# Altium PCB Mach3.PcbDoc
Units mm, origin at the board's own origin, x right, y up, seen from the top; angles counter-clockwise.
Board outline 90 x 24.5 mm, 2 copper layers (Top Layer, Bottom Layer), stack 1.58 mm thick; 21 components, 15 nets, 119 pads, 11 vias.
Unrouted connection lines stored in the file: 1.
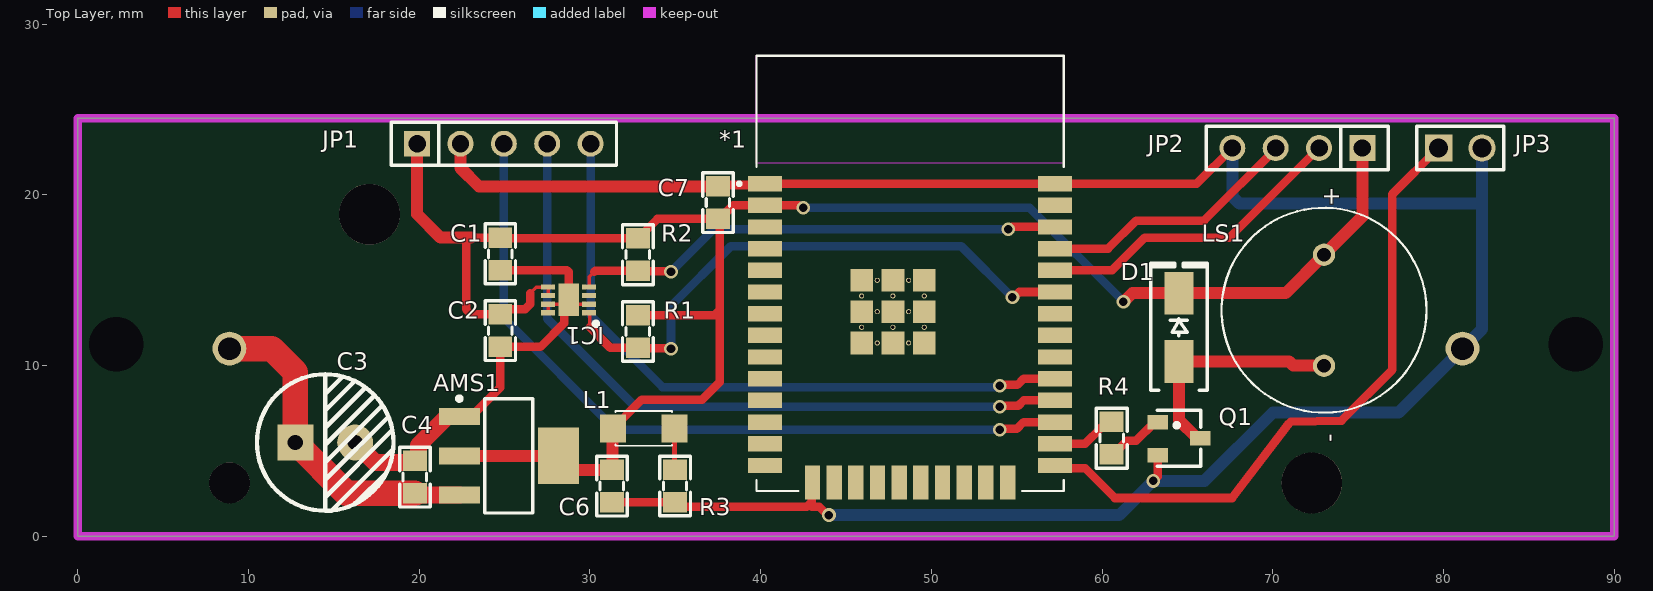
[diagram p0: Top Layer view]
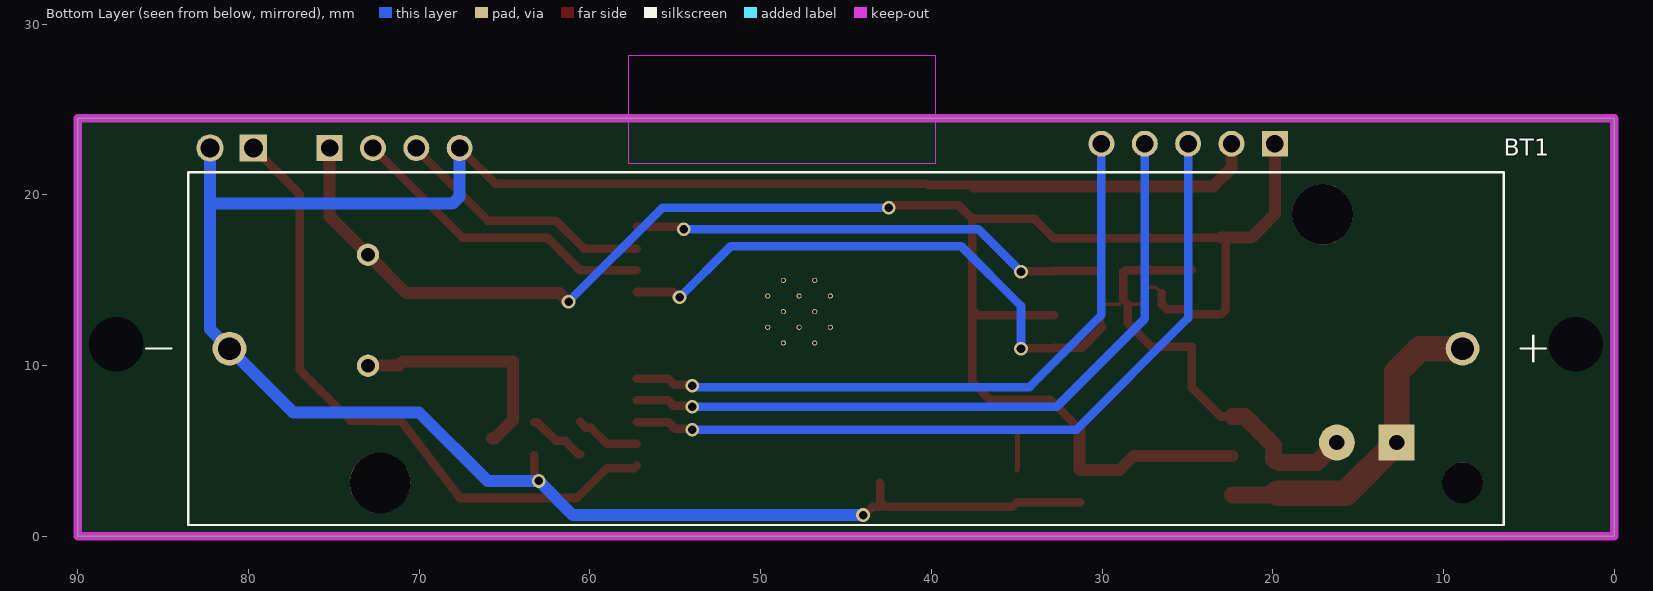
[diagram p1: Bottom Layer view, seen from below]
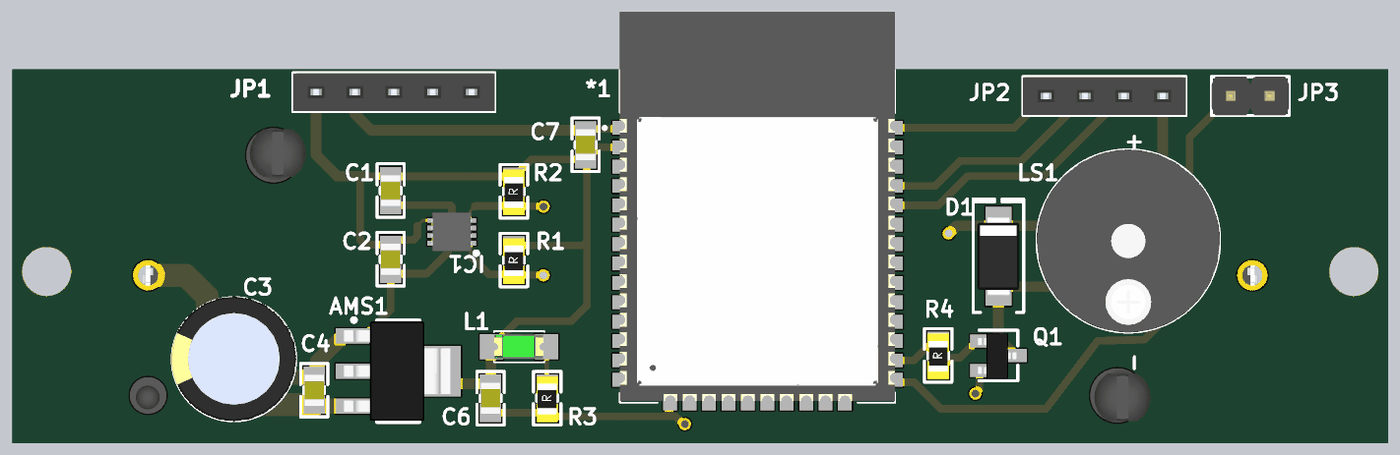
[diagram p2: 3D render of the assembled board from above, using the file's embedded part models]

## Layer stack, top to bottom
Top Solder: solder mask 0.01, Solder Resist, Dk 3.5
Top Layer: signal copper 0.035
Dielectric 1: dielectric 1.51, FR-4, Dk 4.8
Bottom Layer: signal copper 0.035
Bottom Solder: solder mask 0.01, Solder Resist, Dk 3.5

## Board outline
0.001,0 0.001,24.5 90,24.5 90,0

## Design rules (kind name [scope] priority, off if disabled: settings)
Clearance [All] p1: gap=0.3 ignorepadtopadclearanceinfootprint=FALSE
PolygonConnect [All] p1: connectstyle=Relief reliefconductorwidth=0.254 reliefentries=4 polygonreliefangle="90 Angle" airgapwidth=0.254
RoutingVias [All] p1: holewidth=0.5 width=0.8 viastyle="Through Hole" minholewidth=0.2 minwidth=0.45 maxholewidth=0.6 maxwidth=1
SolderMaskExpansion [All] p1: expansion=0.102 istentingtop=FALSE
Width [All] p1: maxlimit=1.5 minlimit=0.15 preferedwidth=0.3
30 further rules are at their usual default settings.

## Components (designator, comment, footprint, x,y, rotation, side; value= is the part's Value field where it differs from the comment)
*1 "ESP32 WROOM 32" ESP32-WROOM-32D 48.75,15.405 r0 top
AMS1 "AMS1117-3.3V" SOT223 25.25,4.721 r270 top value="AMS1117-3.3V SOT223"
BT1 "1043" BAT_1043 45,11 r180 bottom
C1 "4.7uF" "tu 0805" 24.753,16.554 r270 top
C2 "104" "tu 0805" 24.753,12.054 r270 top
C3 "10uF" "tu hoa 8mm" 14.5,5.5 r0 top
C4 "106 (10uF)" "tu 0805" 19.753,3.475 r270 top
C6 "22uF" "tu 0805" 31.291,2.95 r270 top
C7 "104" "tu 0805" 37.503,19.554 r270 top
D1 "M7" "DIODE SMA" 64.5,12.25 r90 top
IC1 "SHT30-DIS-B10KS_1" SON50P250X250X100-9N-D 28.75,13.85 r180 top
JP1 "JP 1x5 2.54" "JP 1x5 CT" 19.88,23 r0 top
JP2 "JP 1x4 2.54" "JP 1x4 CT" 75.25,22.75 r180 top
JP3 "JP 1x2 2.54" "JP 1x2 DT" 79.71,22.75 r0 top
L1 "LED 0805" LED-1206-Green 31.35,6.325 r0 top
LS1 "CCG-1206" CUI_CCG-1206 73,13.25 r270 top
Q1 "BC817" SOT-23 64.5,5.75 r270 top value=C9014
R1 "10k" "tro smd 0805" 32.75,12 r90 top
R2 "10k" "tro smd 0805" 32.75,16.5 r90 top
R3 "1k" "tro smd 0805" 34.925,2.953 r90 top
R4 "1k" "tro smd 0805" 60.5,5.75 r90 top

## Footprints (in the part's own frame and the unit in brackets; to place one, negate y for a bottom-side part, rotate by r counter-clockwise, add the part's x,y. Pads: shape width x height; smd on the part's side, far side on the other; paste and mask are expansions set on the pad)
BAT_1043 [mm]
  round 1.98 hole 1.32: N(-36.11,0) P(36.11,0)
  round 3.55 hole 3.55 unplated: ""(-27.29,-7.87) ""(27.91,7.87)
  round 2.39 hole 2.39 unplated: ""(36.11,-7.87)
  silkscreen extent -41,-10.33 41,10.33, body extent -38.53,-10.33 38.53,10.33, height 14.86
CUI_CCG-1206 [mm]
  round 1.308 hole 0.8: M(3.25,0) P(-3.25,0)
  silkscreen extent -6,-6 6,6, body extent -6,-6 6,6, height 10
"DIODE SMA" [mm] "SMA"
  rect 2.5x1.7 smd: 1(-2,0) 2(2,0)
  silkscreen extent -3.68,-1.65 3.75,1.65, body extent -2.6,-1.37 2.6,1.37, height 2.4
ESP32-WROOM-32D [mm]
  rect 2x0.9 smd: 1(-8.5,5.26) 2(-8.5,3.99) 3(-8.5,2.72) 4(-8.5,1.45) 5(-8.5,0.18) 6(-8.5,-1.09) 7(-8.5,-2.36) 8(-8.5,-3.63) 9(-8.5,-4.9) 10(-8.5,-6.17) 11(-8.5,-7.44) 12(-8.5,-8.71) 13(-8.5,-9.98) 14(-8.5,-11.25) 25(8.5,-11.25) 26(8.5,-9.98) 27(8.5,-8.71) 28(8.5,-7.44) 29(8.5,-6.17) 30(8.5,-4.9) 31(8.5,-3.63) 32(8.5,-2.36) 33(8.5,-1.09) 34(8.5,0.18) 35(8.5,1.45) 36(8.5,2.72) 37(8.5,3.99) 38(8.5,5.26)
  rect 0.9x2 smd: 15(-5.715,-12.25) 16(-4.445,-12.25) 17(-3.175,-12.25) 18(-1.905,-12.25) 19(-0.635,-12.25) 20(0.635,-12.25) 21(1.905,-12.25) 22(3.175,-12.25) 23(4.445,-12.25) 24(5.715,-12.25)
  rect 1.33x1.33 smd: 39(-2.835,-4.075) 39(-2.835,-2.24) 39(-2.835,-0.405) 39(-1,-4.075) 39(-1,-2.24) 39(-1,-0.405) 39(0.835,-4.075) 39(0.835,-2.24) 39(0.835,-0.405)
  round 0.3 hole 0.2: 39(-2.835,-3.157) 39(-2.835,-1.322) 39(-1.917,-4.075) 39(-1.917,-2.24) 39(-1.917,-0.405) 39(-1,-3.157) 39(-1,-1.322) 39(-0.082,-4.075) 39(-0.082,-2.24) 39(-0.082,-0.405) 39(0.835,-3.157) 39(0.835,-1.322)
  Keep-Out Layer region: 9,6.45 -9,6.45 -9,12.75 9,12.75
  Keep-Out Layer region: 9,6.45 -9,6.45 -9,12.75 9,12.75
  silkscreen extent -10.1,-12.75 9,12.75, body extent -9,-12.62 9,12.88, height 3.2
"JP 1x2 DT" [mm] "2 pins, 1 row, straight, gold plating"
  rect 1.6x1.6 hole 1.1: 1(0,0)
  round 1.6 hole 1.1: 2(2.54,0)
  silkscreen extent -1.27,-1.27 3.81,1.27, body extent -1.27,-1.27 3.81,1.27, height 8.54
"JP 1x4 CT" [mm]
  rect 1.52x1.52 hole 1.02: 1(0,0)
  round 1.52 hole 1.02: 2(2.54,0) 3(5.08,0) 4(7.62,0)
  silkscreen extent -1.52,-1.27 9.14,1.27, body extent -1.52,-1.25 9.14,1.25, height 8.51
"JP 1x5 CT" [mm]
  rect 1.52x1.52 hole 1.02: 1(0,0)
  round 1.52 hole 1.02: 2(2.54,0) 3(5.08,0) 4(7.62,0) 5(10.16,0)
  silkscreen extent -1.52,-1.27 11.68,1.27, body extent -1.52,-1.25 11.68,1.25, height 8.51
LED-1206-Green [mil]
  rect 60x65 smd: 1(0,0) 2(142,0)
  silkscreen extent 6,-40 136,40, body extent 7,-31 133,32, height 43
SON50P250X250X100-9N-D [mm]
  rect 0.8x0.3 smd: 1(-1.2,0.75) 2(-1.2,0.25) 3(-1.2,-0.25) 4(-1.2,-0.75) 5(1.2,-0.75) 6(1.2,-0.25) 7(1.2,0.25) 8(1.2,0.75)
  rect 1.2x1.9 smd: 9(0,0)
  silkscreen extent -1.73,1.28 -1.48,1.52, body extent -1.3,-1.25 1.3,1.25, height 1
SOT223 [mm]
  rect 1x2.4 smd: 1(-2.3,-2.9) 2(0,-2.9) 3(2.3,-2.9)
  rect 3.3x2.4 smd: 4(0,2.9)
  silkscreen extent -3.47,-3.02 3.35,1.4, body extent -3.25,-3.56 3.25,3.4, height 1.68
SOT-23 [mm] "SOT 23 _ 1-3-2"
  rect 0.85x1.2 smd: 1(-0.94,-1.245) 2(0.985,-1.25) 3(0.005,1.25)
  silkscreen extent -1.65,-1.27 1.65,1.27, body extent -1.47,-1.33 1.53,1.17, height 1.06
"tro smd 0805" [mm]
  rect 1.2x1.4 smd: 1(-0.946,-0.061) 2(0.954,-0.061)
  silkscreen extent -1.75,-0.97 1.75,0.84, body extent -1.56,-0.76 1.44,0.64, height 0.53
"tu 0805" [mm] "Compoment SMD 80x50mil"
  rect 1.2x1.4 smd: 1(-0.946,-0.003) 2(0.954,-0.003)
  silkscreen extent -1.75,-0.89 1.75,0.89, body extent -1.01,-0.64 1.01,0.63, height 0.61
"tu hoa 8mm" [mm]
  rect 2.1x2.1 hole 0.9: 1(-1.75,0)
  round 2.1 hole 0.9: 2(1.75,0)
  silkscreen extent -4,-4 4,4, body extent -4.1,-4.07 4.1,4.13, height 13.81

## Part data
AMS1: library part "AMS1117 SMD", "Dán", Chung_Loai=Dán, Don_Vi=Con, Ma_Hang=MH000596
BT1: "THM Holder for 18650 Battery", Package="NON STANDARD-5 Keystone", Check_prices=https://www.snapeda.com/parts/1043/Keystone/view-part/?ref=eda, MF="Keystone Electronics", MP=1043, SnapEDA_Link=https://www.snapeda.com/parts/1043/Keystone/view-part/?ref=snap
C1 C2 C6 C7: library part "Tu 0805 104 50V 10%", "Dán", Chung_Loai=Dán, Don_Vi=Con, Ma_Hang=MH004551, So_Chan=2, Ten_Linh_Kien="Tụ 0805 104-100nF 10% 50V"
C3: library part "Tu Hoa 0.1uF 50V 5x11", "Cắm", Chung_Loai=Cắm, Don_Vi=Con, Ma_Hang=MH006853, So_Chan=2, Ten_Linh_Kien="Tụ Hóa 0.1uF 50V"
C4: library part "Tu 0805 106 16V 10%", "Dán", Chung_Loai=Dán, Don_Vi=Con, Ma_Hang=MH004553, So_Chan=2, Ten_Linh_Kien="Tụ 0805 106-10uF 10% 16V"
D1: library part "Diode M7 ( 4007 )", "Dán", Chung_Loai=Dán, Don_Vi=Con, Ma_Hang=MH000944, Ten_Linh_Kien="Diode M7 1N4007 SMD 1A 1000V"
IC1: "Integrated Circuit", Arrow Part Number=SHT30-DIS-B10KS, Manufacturer_Name=Sensirion, Mouser Part Number=403-SHT30-DIS-B10KS, Arrow Price/Stock=https://www.arrow.com/en/products/sht30-dis-b10ks/sensirion-ag?utm_currency=USD&region=nac, Datasheet Link=https://datasheet.lcsc.com/lcsc/2106070104_Sensirion-SHT30-DIS-B10KS_C2687423.pdf, Height=1mm, Manufacturer_Part_Number=SHT30-DIS-B10KS, Mouser Price/Stock=https://www.mouser.co.uk/ProductDetail/Sensirion/SHT30-DIS-B10kS?qs=MLItCLRbWsxrR5sxpa2%2FcQ%3D%3D
JP1: library part "JP 1x5 2.54 Cai Thang", "Cắm", Chung_Loai=Cắm, Don_Vi=Con, Ma_Hang=MH004006, Ten_Linh_Kien="Jump Đơn Cái 2.54MM 1x20P Thẳng"
JP2: library part "JP 1x4 2.54 Cai Thang", "Cắm", Chung_Loai=Cắm, Don_Vi=Con, Ma_Hang=MH004006, Ten_Linh_Kien="Jump Đơn Cái 2.54MM 1x20P Thẳng"
JP3: library part "JP 1x2 2.54 Duc Thang", "Cắm", Chung_Loai=Cắm, Don_Vi=Con, Ma_Hang=MH000903, Ten_Linh_Kien="Jump Đơn Đực 2.54MM 1x40P Thẳng 11MM"
L1: library part "LED 1206 Xanh La", "Dán", Chung_Loai=Dán, Don_Vi=Con, Ma_Hang=MH002947, Ten_Linh_Kien="LED1206 Màu Xanh Lá (Green)"
LS1: "12 mm, 5 V, 85 dB, Through Hole, Sealed, Magnetic Audio Transducer Buzzer", Package=None, Check_prices=https://www.snapeda.com/parts/CCG-1206/Same+Sky/view-part/?ref=eda, MF="Same Sky", MP=CCG-1206, SnapEDA_Link=https://www.snapeda.com/parts/CCG-1206/Same+Sky/view-part/?ref=snap
Q1: library part "Trans BC817", "SOT-23 - C8658"
R1 R2 R3 R4: library part "Tro 0805 1% 1k", "Dán", Chung_Loai=Dán, Don_Vi=Con, Ma_Hang=MH005468, So_Chan=2, Ten_Linh_Kien="Trở 0805 1% 1k"

## Free pads (board coordinates)
  round 1.524 hole 3.2: 1(2.25,11.25) 1(87.75,11.25)

## Via types
v1: diameter 0.8, hole 0.5, Top Layer to Bottom Layer, 11 vias

## Nets (pads, with @x,y where several pads share a name; then routed paths per layer and width w, separated by ;. In a path a pad name is that pad's centre, name@x,y a point inside that pad or via, vN(x,y) a via of type N, cw(c..) or ccw(c..) an arc to the next point about the centre after c; other vN are vias at no path point)
3V3: *1.2 AMS1.2 AMS1.4 C1.1 C2.1 C6.1 C7.2 D1.2 IC1.5 IC1.6 JP1.1 JP2.1 L1.1 LS1.P R1.2 R2.2 | length 113.7
  Top Layer w0.2: 26.5,14.25 26.85,14.6 IC1.5 IC1.6
  Top Layer w0.5: 26.5,14.25 26.5,13.598 26.207,13.305 25.055,13.305 C2.1 23.043,13 22.75,13.293 22.75,17.207 23.043,17.5 C1.1 24.773,17.477 32.788,17.477 R2.2 33.956,18.6 C7.2 C7.2@37.6,18.6 ; L1.1 33.025,8 36.568,8 37.6,9.032 37.6,13.247 ; R1.2 37.307,12.954 37.6,13.247 ; v1(42.5,19.25) 42.419,19.25 42.274,19.395 *1.2 38.395,19.395 C7.2@37.6,18.6 ; 37.6,13.247 C7.2@37.6,18.6
  Top Layer w0.7: JP1.1 19.88,18.87 21.25,17.5 23.043,17.5 ; AMS1.2 AMS1.4 28.975,3.896 C6.1 31.319,3.927 31.319,6.294 L1.1 ; v1(61.25,13.75) 61.277,13.75 61.777,14.25 D1.2 70.75,14.25 LS1.P 75.25,18.75 JP2.1
  Bottom Layer w0.5: v1(42.5,19.25) 55.75,19.25 v1(61.25,13.75)
buz: *1.26 R4.2 | length 3.8
  Top Layer w0.5: *1.26 59,5.425 59.929,6.354 60.211,6.354 R4.2
ESP32_RX: *1.34 JP2.2 | length 18.4
  Top Layer w0.5: *1.34 60.585,15.585 62.5,17.5 67.46,17.5 JP2.2
ESP32_TX: *1.35 JP2.3 | length 15.4
  Top Layer w0.5: *1.35 60.355,16.855 62,18.5 65.974,18.5 70.17,22.696 JP2.3
GND: *1.1 *1.15 *1.38 AMS1.1 BT1.N C1.2 C2.2 C3.2 C4.1 C6.2 C7.1 IC1.2 IC1.7 IC1.8 IC1.9 JP1.2 JP2.4 JP3.2 Q1.2 R3.1 | length 162.6
  Top Layer w0.2: IC1.8 IC1.7 IC1.9@28.5,13.6 ; IC1.9 29,13.6 IC1.2
  Top Layer w0.5: AMS1.1 23.05,7.021 24.75,8.721 C2.2 27.1,11.1 28.495,12.495 IC1.9@28.495,13.595 ; C1.2 28.65,15.6 28.75,15.5 IC1.9 ; C6.2 31.294,2.001 34.98,2.001 R3.1 35.243,1.75 42.707,1.75 42.854,1.896 ; C7.1 37.583,20.582 40.168,20.582 *1.1 *1.38 65.545,20.665 JP2.4 ; *1.15 43,3.12 43,2.043 42.854,1.896 ; v1(44,1.25) 43.919,1.25 43.419,1.75 43,1.75 42.854,1.896 ; v1(63,3.25) 63.25,3.5 Q1.2
  Top Layer w0.7: JP1.2 22.42,21.58 23.5,20.5 C7.1
  Top Layer w1: C3.2 17.429,4.321 19.65,4.321 C4.1 19.85,4.421 19.95,4.521 19.95,5.321 21.65,7.021 AMS1.1
  Bottom Layer w0.7: v1(44,1.25) 61,1.25 v1(63,3.25) 66,3.25 70,7.25 77.36,7.25 BT1.N 82.25,12.14 82.25,19.5 ; JP2.4 67.63,19.91 68.04,19.5 82.25,19.5 ; JP3.2 82.25,19.5
IO0: *1.25 JP3.1 | length 38.1
  Top Layer w0.5: *1.25 57.405,4 59,4 60.75,2.25 67.61,2.25 70.852,6.515 70.873,6.542 71.038,6.707 74.032,6.782 77,9.75 77,20.04 JP3.1
NetD1_1: D1.1 LS1.M Q1.3 | length 13.7
  Top Layer w0.7: Q1.3 65.575,5.745 64.5,6.82 D1.1 70.946,10.25 71.196,10 LS1.M
NetL1_2: L1.2 R3.2 | length 2.4
  Top Layer w0.3: L1.2 34.957,3.936 R3.2
NetQ1_1: Q1.1 R4.1 | length 3.5
  Top Layer w0.5: R4.1 60.661,4.804 61.457,5.6 61.991,5.6 63.08,6.69 Q1.1
SCL: *1.36 IC1.4 R2.1 | length 29.2
  Top Layer w0.2: IC1.4 29.95,15.2 30.25,15.5
  Top Layer w0.5: 30.25,15.5 30.304,15.554 R2.1 32.838,15.527 34.723,15.527 v1(34.75,15.5) ; v1(54.5,18) 54.581,18 54.706,18.125 *1.36
  Bottom Layer w0.5: v1(34.75,15.5) 37.25,18 v1(54.5,18)
SDA: *1.33 IC1.1 R1.1 | length 33.7
  Top Layer w0.2: IC1.1 30,13.05 30,12.25
  Top Layer w0.5: 30,12.25 31.196,11.054 R1.1 32.838,11.027 34.473,11.027 v1@34.5,11 ; v1(54.75,14) 54.831,14 55.146,14.315 *1.33
  Bottom Layer w0.5: v1(34.75,11) 34.75,13.5 38.25,17 51.75,17 v1(54.75,14)
STATUS: *1.29 JP1.5 | length 39.2
  Top Layer w0.5: v1(54,8.819) 54.057,8.877 55.042,8.877 55.4,9.235 *1.29
  Bottom Layer w0.5: JP1.5 30.04,12.96 34.25,8.75 53.719,8.75 53.73,8.762 53.943,8.762 v1(54,8.819)
UART_RX: *1.27 JP1.3 | length 45.4
  Top Layer w0.5: v1(54,6.25) 54.057,6.307 55.012,6.307 55.4,6.695 *1.27
  Bottom Layer w0.5: JP1.3 24.96,12.79 31.5,6.25 v1(54,6.25)
UART_TX: *1.28 JP1.4 | length 42.3
  Top Layer w0.5: v1(54,7.599) 54.057,7.656 55.091,7.656 55.4,7.965 *1.28
  Bottom Layer w0.5: JP1.4 27.5,12.75 32.651,7.599 v1(54,7.599)
V_BATT: AMS1.3 BT1.P C3.1 C4.2 | length 19.4
  Top Layer w1: C4.2 19.85,2.421 AMS1.3
  Top Layer w1.5: BT1.P 11.371,11 12.75,9.621 C3.1 15.729,2.521 C4.2
pads on no net: *1.3 *1.4 *1.5 *1.6 *1.7 *1.8 *1.9 *1.10 *1.11 *1.12 *1.13 *1.14 *1.16 *1.17 *1.18 *1.19 *1.20 *1.21 *1.22 *1.23 *1.24 *1.30 *1.31 *1.32 *1.37 *1.39 BT1. IC1.3

## Keep-outs
Keep-Out Layer:
  the board outline again, w0.5

## Text inside footprints (layer, text, board x,y; h text height)
*1: Mechanical 13 "ANTENNA" at 42.75,24.405 h1
LS1: Top Overlay "+" at 73,20.48 h1 r270; Top Overlay "-" at 73,6.025 h1 r270